# Altium PCB PCB3.PcbDoc
Units mm, origin at the board's own origin, x right, y up, seen from the top; angles counter-clockwise.
Board outline 12.5 x 24.5 mm, 2 copper layers (Top Layer, Bottom Layer); 9 components, 5 nets, 20 pads, 0 vias.
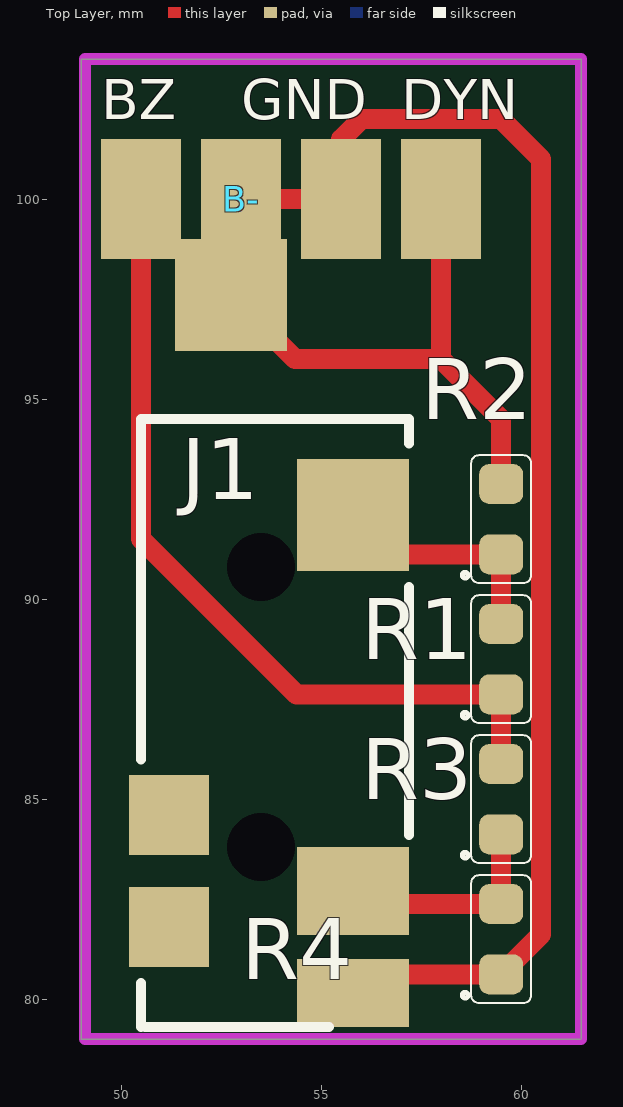
[diagram p0: Top Layer view]
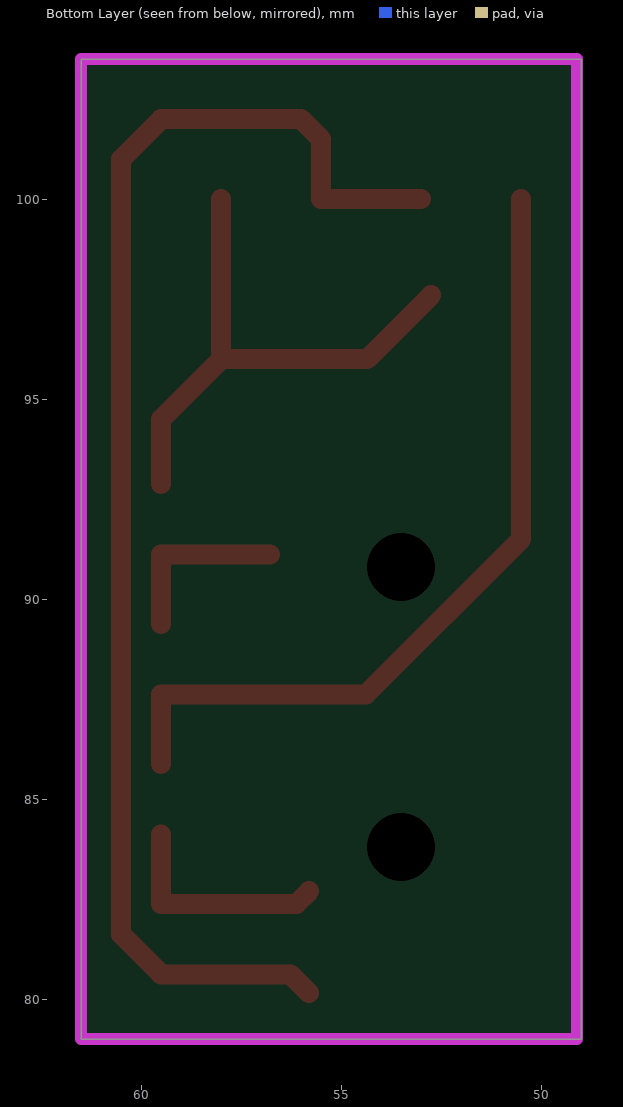
[diagram p1: Bottom Layer view, seen from below]

## Layer stack, top to bottom
Top Layer: signal copper 0.0356
Dielectric: dielectric 0.32, FR-4, Dk 4.8
Bottom Layer: signal copper 0.0356

## Board outline
49,103.5 49,79 61.5,79 61.5,103.5 49,103.5

## Design rules (kind name [scope] priority, off if disabled: settings)
Clearance [All] p1: gap=0.15
MinimumSolderMaskSliver [All] p1: minsoldermaskwidth=0.15
PolygonConnect [All] p1: connectstyle=Relief reliefconductorwidth=0.254 reliefentries=4 polygonreliefangle="90 Angle" airgapwidth=0.254
RoutingVias [All] p1: holewidth=0.3 width=0.7 viastyle="Through Hole" minholewidth=0.711 minwidth=1.27 maxholewidth=0.711 maxwidth=1.27
SilkscreenOverComponentPads [IsPad] p1: minsilkscreentomaskgap=0.15
SolderMaskExpansion [All] p1: expansion=0.102
Width [All] p1: maxlimit=3 minlimit=0.15 preferedwidth=0.3
26 further rules are at their usual default settings.

## Components (designator, comment, footprint, x,y, rotation, side; value= is the part's Value field where it differs from the comment)
B- "BZ-" "Solder PAD 4*4"#1 53,100 r0 top (schematic designator BZ-1)
BZ "BZ+" "Solder PAD 4*4"#1 50.5,100 r0 top (schematic designator BZ+1)
DYN "toBZ+" "Solder PAD 4*4"#1 58,100 r0 top (schematic designator DYN1)
GND "GND" "Solder PAD 4*4"#2 55.5,100 r90 top (schematic designator DYN_GND1)
J1 "Jack 3.5\"" "micro SJ-43515TS-SMT - duplicate - duplicate" 53.5,79.3 r90 top
R1 "Res_2.54" 1608[0603]-Xs1.0Ys1.1A0.76RR_RES 59.5,88.5 r90 top
R2 "Res_2.54" 1608[0603]-Xs1.0Ys1.1A0.76RR_RES 59.5,92 r90 top
R3 "Res_2.54" 1608[0603]-Xs1.0Ys1.1A0.76RR_RES 59.5,85 r90 top
R4 "Res_2.54" 1608[0603]-Xs1.0Ys1.1A0.76RR_RES 59.5,81.5 r90 top

## Footprints (in the part's own frame and the unit in brackets; to place one, negate y for a bottom-side part, rotate by r counter-clockwise, add the part's x,y. Pads: shape width x height; smd on the part's side, far side on the other; paste and mask are expansions set on the pad)
1608[0603]-Xs1.0Ys1.1A0.76RR_RES [mm] "Chip; Body 1.6 x 0.8 mm (LxW typ)"
  rrect50% 1x1.1 smd mask+0.1: 1(-0.88,0) 2(0.88,0)
  silkscreen extent -1.6,-0.75 1.6,0.97, body extent -0.8,-0.4 0.8,0.4, height 0.45
"micro SJ-43515TS-SMT - duplicate - duplicate" [mm] "3.5mm Jack 4pin"
  rect 0x0 hole 1.7: 0(4.5,0) 0(11.5,0)
  rect 1.7x2.8 smd: 1(0.85,-2.3)
  rect 2.8x2.8 smd: 2(12.8,-2.3) 5(18.3,0.75)
  rect 2x2 smd: 3(5.3,2.3) 6(2.5,2.3)
  rect 2.2x2.8 smd: 4(3.4,-2.3)
  silkscreen extent 0,-3.7 15.2,3
"Solder PAD 4*4"#1 [mm]
  rect 2x3 smd: 1(0,0)
"Solder PAD 4*4"#2 [mm]
  rect 3x2 smd: 1(0,0)

## Part data
B- BZ DYN GND: library part Plug, "Plug"
J1: library part "PhoneJack 4contact", "miniJack 4 contact"
R1 R2 R3 R4: "Resistor"

## Nets (pads, with @x,y where several pads share a name; then routed paths per layer and width w, separated by ;. In a path a pad name is that pad's centre, name@x,y a point inside that pad or via, vN(x,y) a via of type N, cw(c..) or ccw(c..) an arc to the next point about the centre after c; other vN are vias at no path point)
GND: B-.1 GND.1 J1.1 R4.1 | length 34.3
  Top Layer w0.5: B-.1 GND.1 55.5,101.5 56,102 59.5,102 60.5,101 60.5,81.62 R4.1 56.27,80.62 J1.1
NetBZ+1_1: BZ.1 R1.1 R3.2 | length 20.8
  Top Layer w0.5: BZ.1 50.5,91.5 54.38,87.62 R1.1 R3.2
NetDYN1_1: DYN.1 J1.5 R2.2 | length 13.7
  Top Layer w0.5: J1.5 54.35,96 58,96 ; DYN.1 58,96 ; R2.2 59.5,94.5 58,96
NetJ1_2: J1.2 R1.2 R2.1 | length 4.5
  Top Layer w0.5: J1.2@56.78,91.12 R2.1 R1.2
NetJ1_4: J1.4 R3.1 R4.2 | length 5.6
  Top Layer w0.5: J1.4 56.12,82.38 R4.2 R3.1
pads on no net: J1.0 J1.3 J1.6

## Keep-outs
Keep-Out Layer:
  lines w0.3: 49.1,79 61.5,79 61.5,103.5 56.9,103.5 53.7,103.5 49.1,103.5 49.1,79

## Silkscreen, mask and mechanical layers (free items; w line width, h text height)
Mechanical 4:
  the board outline again, w0.254
outline:
  lines w0.254: 49,79 49,103.5 61.5,103.5 61.5,102.5 61.5,100 61.5,97.5 61.5,95 61.5,92.5 61.5,90 61.5,87.5 61.5,85 61.5,82.5 61.5,79 60,79 49,79
Drill Drawing:
  text ".LEGEND" at 70.88,81.28 h1.52
  text "Drill Drawing." at 70.88,78.74 h1.52

## Dimensions
49.1,79 to 61.5,79 on Mechanical 4
49.1,79 to 49.1,103.5 on Mechanical 4